# Altium PCB CSP_inFET_withThermometer.PcbDoc
Units mm, origin at the board's own origin, x right, y up, seen from the top; angles counter-clockwise.
Board outline 10.8 x 13.9 mm, 2 copper layers (Top Layer, Bottom Layer); 15 components, 12 nets, 34 pads, 3 vias.
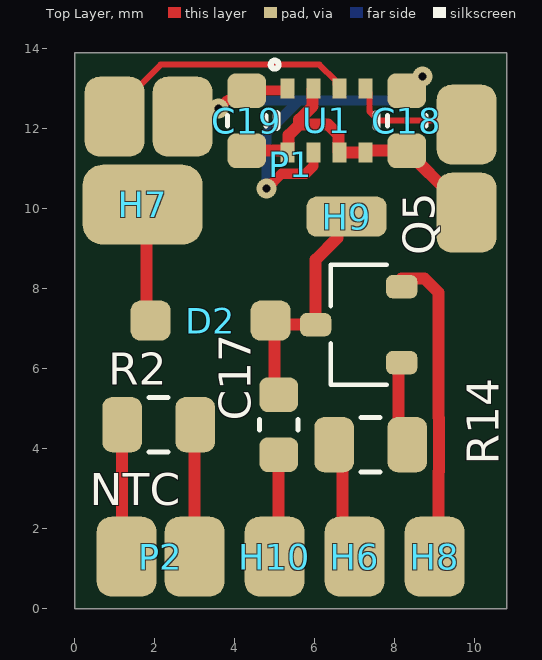
[diagram p0: Top Layer view]
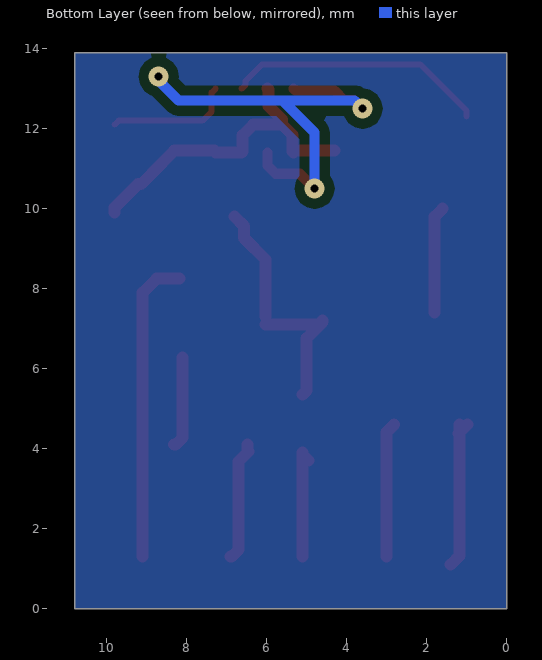
[diagram p1: Bottom Layer view, seen from below]
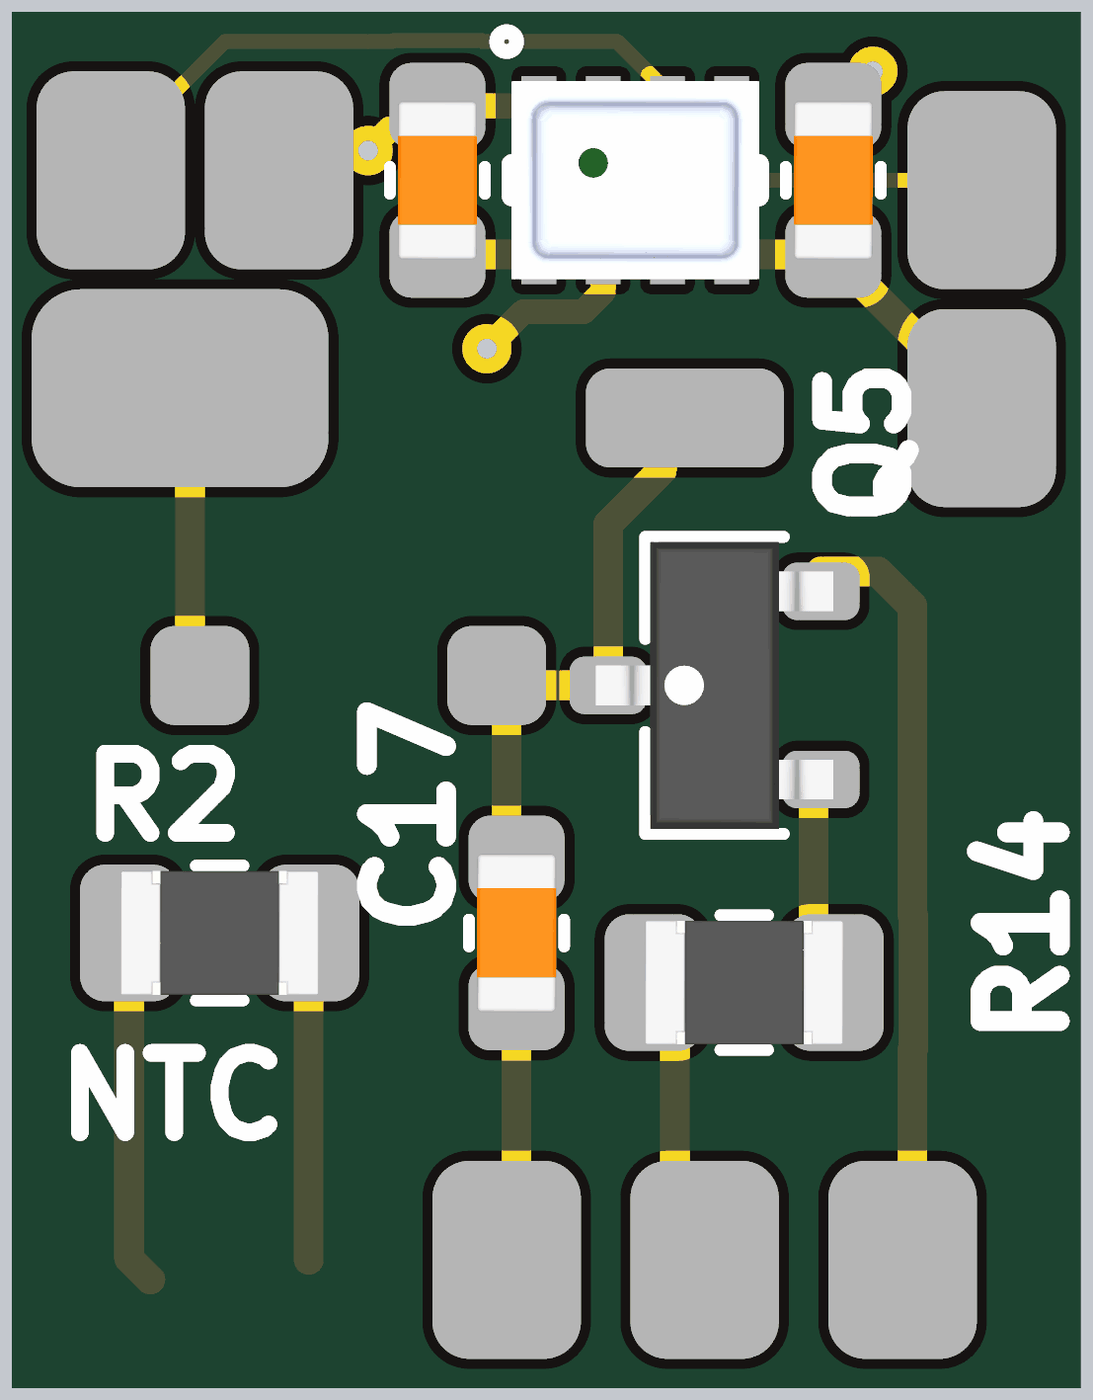
[diagram p2: 3D render of the assembled board from above, using the file's embedded part models]

## Layer stack, top to bottom
Top Solder: solder mask 0.0102, Solder Resist, Dk 3.5
Top Layer: signal copper 0.0356
Dielectric 1: dielectric 0.32, FR-4, Dk 4.8
Bottom Layer: signal copper 0.0356
Bottom Solder: solder mask 0.0102, Solder Resist, Dk 3.5

## Board outline
0,0 10.8,0 10.8,13.9 0,13.9

## Design rules (kind name [scope] priority, off if disabled: settings)
Clearance [All] p1: gap=0.25 ignorepadtopadclearanceinfootprint=FALSE except(0: Arc-Hole Track-Hole SMDPad-Hole THPad-Hole Via-Hole Fill-Hole Poly-Hole Region-Hole Text-Hole; 0.15: Arc-Arc Arc-Track Arc-SMDPad Track-Track Track-SMDPad; 0.2: Arc-Via Track-Via SMDPad-SMDPad; 0.5: THPad-THPad)
HoleSize [All] p1: absolutevalues=TRUE maxlimit=6.3 minlimit=0.2 maxpercent=80.000 minpercent=20.000
MinimumAnnularRing [All] p1: minimumring=0.13
MinimumSolderMaskSliver [All] p1 off: minsoldermaskwidth=0.254
PolygonConnect [All] p1: connectstyle=Relief reliefconductorwidth=0.254 reliefentries=4 polygonreliefangle="90 Angle" airgapwidth=0.254
RoutingVias [All] p1: holewidth=0.3 width=0.6 viastyle="Through Hole" minholewidth=0.2 minwidth=0.45 maxholewidth=6.3 maxwidth=6.7
SilkToSilkClearance [All] p1: silktosilkclearance=0.15
SilkToSolderMaskClearance [IsPad] p1: minsilkscreentomaskgap=0.15 clearancetoexposedcopper=TRUE
SolderMaskExpansion [All] p1: expansion=0.102 istentingtop=FALSE useseparateexpansions=TRUE expansionbottom=0.102 istentingbottom=TRUE
Width [All] p1: maxlimit=0.5 minlimit=0.15 preferedwidth=0.3 minimp=50.000000 maximp=50.000000 favimp=50.000000
26 further rules are at their usual default settings.

## Components (designator, comment, footprint, x,y, rotation, side; value= is the part's Value field where it differs from the comment)
C17 "Cap" CAPC160X80X90L35N 5.1,4.6 r90 top value=0.3pF
C18 "1uF" CAPC160X80X90L35N 8.3,12.2 r90 top
C19 "1uF" CAPC160X80X90L35N 4.3,12.2 r90 top
D2 "Detector" Detector 1.9,7.2 r0 top
H6 "PAD" PAD_rounded#1 7,1.3 r90 top
H7 "PAD" PAD_rounded#2 1.7,10.1 r0 top
H8 "PAD" PAD_rounded#1 9,1.3 r90 top
H9 "TEST" PAD_rounded#3 6.8,9.8 r0 top
H10 "PAD" PAD_rounded#1 5,1.3 r270 top
P1 "BMP280 conncetor" "FOUR PADS" 14.5,13.1 r0 top value=1uF
P2 "NTC connector" "TWO PADS - small" -6,2 r90 top value=1uF
Q5 "JFET-N" SOT23-3P95_240X114L20X40N 7.1,7.1 r90 top
R2 "10k" RESC200X125X70L40N 2.1,4.6 r180 top
R14 "33" RESC200X125X70L40N 7.4,4.1 r180 top
U1 "BMP280" BOSC-LGA-8_V 6.3,12.2 r0 top

## Footprints (in the part's own frame and the unit in brackets; to place one, negate y for a bottom-side part, rotate by r counter-clockwise, add the part's x,y. Pads: shape width x height; smd on the part's side, far side on the other; paste and mask are expansions set on the pad)
BOSC-LGA-8_V [mm]
  rect 0.35x0.5 smd: 1(-0.975,0.8) 2(-0.325,0.8) 3(0.325,0.8) 4(0.975,0.8) 5(0.975,-0.8) 6(0.325,-0.8) 7(-0.325,-0.8) 8(-0.975,-0.8)
  silkscreen extent -1.4,-0.16 1.25,1.5, body extent -1.25,-1 1.25,1, height 1
CAPC160X80X90L35N [mm] "Capacitor, Chip; 1.60 mm L X 0.80 mm W X 0.90 mm H body"
  rrect51% 0.87x0.97 smd: 1(-0.75,0) 2(0.75,0)
  silkscreen extent -0.14,-0.48 0.14,0.48, body extent -0.8,-0.4 0.8,0.4, height 0.9
Detector [mm]
  rrect50% 1x1 smd: A(3,0) C(0,0)
  body extent -1.5,-1.5 1.5,1.5, height 1.1
"FOUR PADS" [mm]
  rrect50% 1.5x2 smd: 3V3(-4.7,-3.2) GND(-11.8,-0.8) SCL(-4.7,-1) SDA(-13.5,-0.8)
PAD_rounded#1 [mm]
  rrect50% 2x1.5 smd: 1(0,0)
PAD_rounded#2 [mm]
  rrect50% 3x2 smd: 1(0,0)
PAD_rounded#3 [mm]
  rrect50% 2x1 smd: 1(0,0)
RESC200X125X70L40N [mm] "Resistor, Chip; 2.00 mm L X 1.25 mm W X 0.70 mm H body"
  rrect51% 0.99x1.38 smd: 1(-0.915,0) 2(0.915,0)
  silkscreen extent -0.24,-0.68 0.24,0.68, body extent -1,-0.62 1,0.63, height 0.7
SOT23-3P95_240X114L20X40N [mm] "Small Outline Transistor (SOT23), 0.95 mm pitch; 3 pin, 2.90 mm L X 1.30 mm W X 1.14 mm H body"
  rrect52% 0.58x0.78 smd: 1(0,1.075) 2(0.95,-1.075) 3(-0.95,-1.075)
  silkscreen extent -1.5,-0.7 1.5,0.7, body extent -1.45,-1.2 1.45,1.2, height 1.14
"TWO PADS - small" [mm] "3.00 mm x 2.00 mm, 1.00 mm space"
  rrect50% 2x1.5 smd: 1(-0.7,-7.3) 2(-0.7,-9)

## Part data
C17: "Capacitor", LatestRevisionDate=17-Jul-2002, LatestRevisionNote="Re-released for DXP Platform.", PackageDescription="Radial Cap, Thru-Hole; 2 Leads; 0.3 in Pin Spacing", PackageReference=RAD-0.3, Published=8-Jun-2000, Publisher="Altium Limited"
C18 C19: library part capacitor
D2: library part Diode
H9: library part PAD
P1: library part "PADS for BMP"
P2: library part "TWO PADS"
Q5: "N-Channel JFET", Code_JEDEC=TO-254-AA, LatestRevisionDate=17-Jul-2002, LatestRevisionNote="Re-released for DXP Platform.", PackageReference=TO-254-AA, Published=8-Jun-2000, Publisher="Altium Limited"
R2: library part Resistor
R14: library part Res1, "Resistor", LatestRevisionDate=17-Jul-2002, LatestRevisionNote="Re-released for DXP Platform.", PackageDescription="Axial Device, Thru-Hole; 2 Leads; 0.3 in Pin Spacing", PackageReference=AXIAL-0.3, Published=8-Jun-2000, Publisher="Altium Limited"
U1: "Digital Pressure Sensor, 1.71 to 3.6 V, -40 to 85 degC, 8-Pin LGA, RoHS, Tape and Reel", Manufacturer="Bosch Sensortec", Manufacturer name=Bosch, Datasheet URL=http://datasheet.octopart.com/BMP280-Bosch-datasheet-41546027.pdf, Datasheet Version="Rev. 1.14, 05/2015", Manufacturer Part Number=BMP280, Manufacturer URL=http://www.bosch-sensortec.com, Part Number=BMP280

## Via types
v1: diameter 0.5, hole 0.2, Top Layer to Bottom Layer, tented bottom, 3 vias

## Nets (pads, with @x,y where several pads share a name; then routed paths per layer and width w, separated by ;. In a path a pad name is that pad's centre, name@x,y a point inside that pad or via, vN(x,y) a via of type N, cw(c..) or ccw(c..) an arc to the next point about the centre after c; other vN are vias at no path point)
3V3: C18.1 C19.1 P1.3V3 U1.2 U1.5 U1.6 U1.8 | length 8.4
  Top Layer w0.3: C19.1 5.3,11.45 5.325,11.425 U1.8 5.35,11.425 5.35,11.836 5.614,12.1 ; U1.2 5.95,12.975 5.95,12.564 5.614,12.227 5.614,12.1 ; P1.3V3 9.8,10.028 9.217,10.611 9.139,10.611 8.635,11.115 8.635,11.126 8.311,11.45 C18.1 7.3,11.45 7.275,11.425 U1.5 U1.6 6.6,11.425 6.6,11.836 6.336,12.1 5.614,12.1
GND: C18.2 C19.2 P1.GND U1.1 U1.7 | length 12
  Top Layer w0.254: v1(3.6,12.5) 3.817,12.717 4.067,12.717 C19.2 5.277,12.95 5.325,12.998 U1.1 ; v1(4.8,10.5) 5.173,10.873 5.774,10.873 5.975,11.074 U1.7 ; C18.2@8.6,13.2 v1(8.7,13.3)
  Bottom Layer w0.254: v1(3.6,12.5) 3.8,12.7 5.6,12.7 ; v1(4.8,10.5) 4.8,11.9 5.6,12.7 ; v1(8.7,13.3) 8.8,13.3 8.2,12.7 5.6,12.7
GND_HF: H8.1 Q5.2 | length 7.7
  Top Layer w0.3: Q5.2@8.175,8.25 8.75,8.25 9.1,7.9 9.1,4.776 9.11,4.766 9.11,3.434 9.1,3.424 H8.1@9.1,1.3
NetC17_1: C17.1 H10.1 | length 2.8
  Top Layer w0.3: C17.1@4.95,3.7 C17.1 ; H10.1@5.1,1.3 C17.1 ; C17.1@5.1,3.9 C17.1
NetC17_2: C17.2 D2.A H9.1 Q5.1 | length 6.3
  Top Layer w0.3: C17.2 5,5.45 5,6.762 4.6,7.162 4.6,7.2 4.7,7.1 Q5.1 ; Q5.1@6.025,7.3 6.025,8.725 6.567,9.267 6.567,9.567 H9.1
NetD2_C: D2.C H7.1 | length 2.7
  Top Layer w0.3: H7.1@1.6,10 1.8,9.8 D2.C@1.8,7.4
NetH6_1: H6.1 R14.2 | length 3
  Top Layer w0.3: R14.2 6.485,3.951 6.459,3.926 6.7,3.685 6.7,1.476 6.876,1.3 H6.1@6.9,1.3
NetP2_1: P2.1 R2.2 | length 3.9
  Top Layer w0.3: R2.2@0.985,4.6 R2.2@1.185,4.4 ; R2.2 R2.2@1.185,4.4 ; R2.2@1.2,4.385 R2.2@1.185,4.4 ; P2.1@1.4,1.1 1.185,1.315 R2.2@1.185,4.4
NetP2_2: P2.2 R2.1 | length 3.4
  Top Layer w0.3: R2.1@2.815,4.6 3,4.415 P2.2
NetQ5_3: Q5.3 R14.1 | length 2.3
  Top Layer w0.3: Q5.3@8.1,6.275 8.1,4.276 8.276,4.1 R14.1
SCL: P1.SCL U1.4 | length 3.2
  Top Layer w0.15: U1.4 7.375,12.9 7.375,12.425 7.6,12.2 9.7,12.2 P1.SCL
SDA: P1.SDA U1.3 | length 6.6
  Top Layer w0.15: P1.SDA 1,12.449 2.151,13.6 3.842,13.6 3.852,13.61 4.748,13.61 4.758,13.6 6.118,13.6 6.525,13.193 6.525,13.1 U1.3

## Polygon pours and split planes (outlines as drawn)
no net on Top Layer "NONET_L-01_P-001" (solid, pour order 53): 0,3.7
no net on Top Layer "NONET_L-01_P-001" (solid, pour order 51): -1,13.2
no net on Top Layer "NONET_L-01_P-001" (solid, pour order 48): 12.589,8.363
no net on Top Layer "NONET_L01_P018" (solid, pour order 18): -1.254,26.778
no net on Top Layer "NONET_L01_P017" (solid, pour order 17): -1.254,27.159
no net on Top Layer "NONET_L01_P008" (solid, pour order 8): 6.366,93.326
no net on Top Layer "NONET_L01_P003" (solid, pour order 3): 36.338,77.832
no net on Top Layer "NONET_L01_P000" (solid, pour order 0): 27.702,85.96
no net on Bottom Layer "NONET_L-01_P-001" (solid, pour order 55): 0,13.9 10.8,13.9 10.8,0 0,0
no net on Bottom Layer "NONET_L-01_P-001" (solid, pour order 46): 10.43,53.194
no net on Bottom Layer "NONET_L-01_P-001" (solid, pour order 44): 5.731,53.829
no net on Bottom Layer "NONET_L-01_P-001" (solid, pour order 43): 5.731,53.829 5.731,48.495
GND_HF on Bottom Solder "NONET_L-01_P-001" (solid, pour order 54): 0,13.9 10.8,13.9 10.8,0 0,0

## Silkscreen, mask and mechanical layers (free items; w line width, h text height)
Top Overlay:
  text "NTC" at 0.38,2.58 h0.8
Bottom Solder:
  pour cut-out: 4.5,10.1 4.5,12.3 5.5,12.3 5.5,10.1
  pour cut-out: 3.1,13 3.1,12.3 8.5,12.3 9.4,13.2 8.75,13.85 7.9,13
Mechanical 4:
  the board outline again, w0.1